# EAGLE board ESP-DMX (EAGLE 7.7.0)
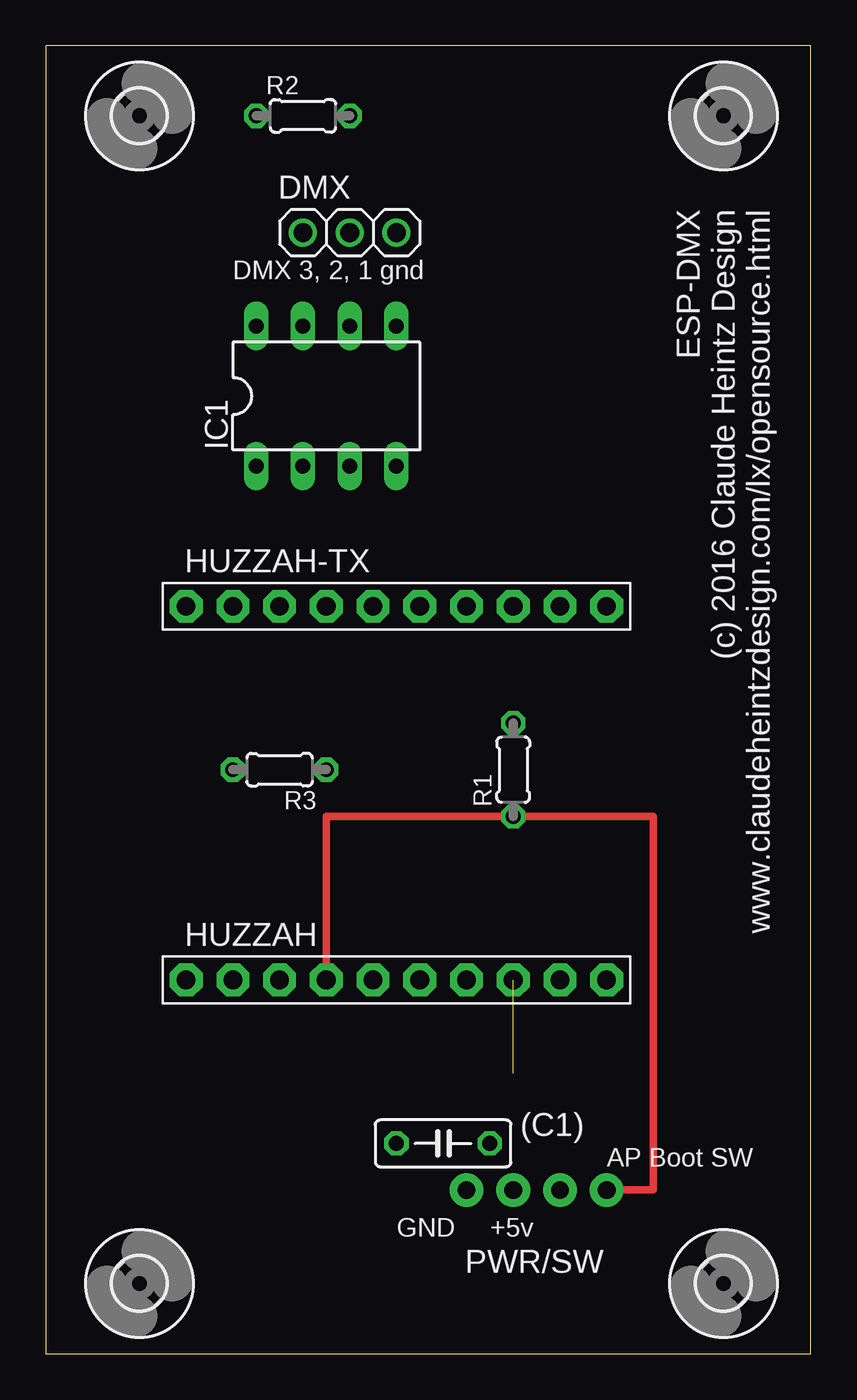
[diagram p0: board, top side]
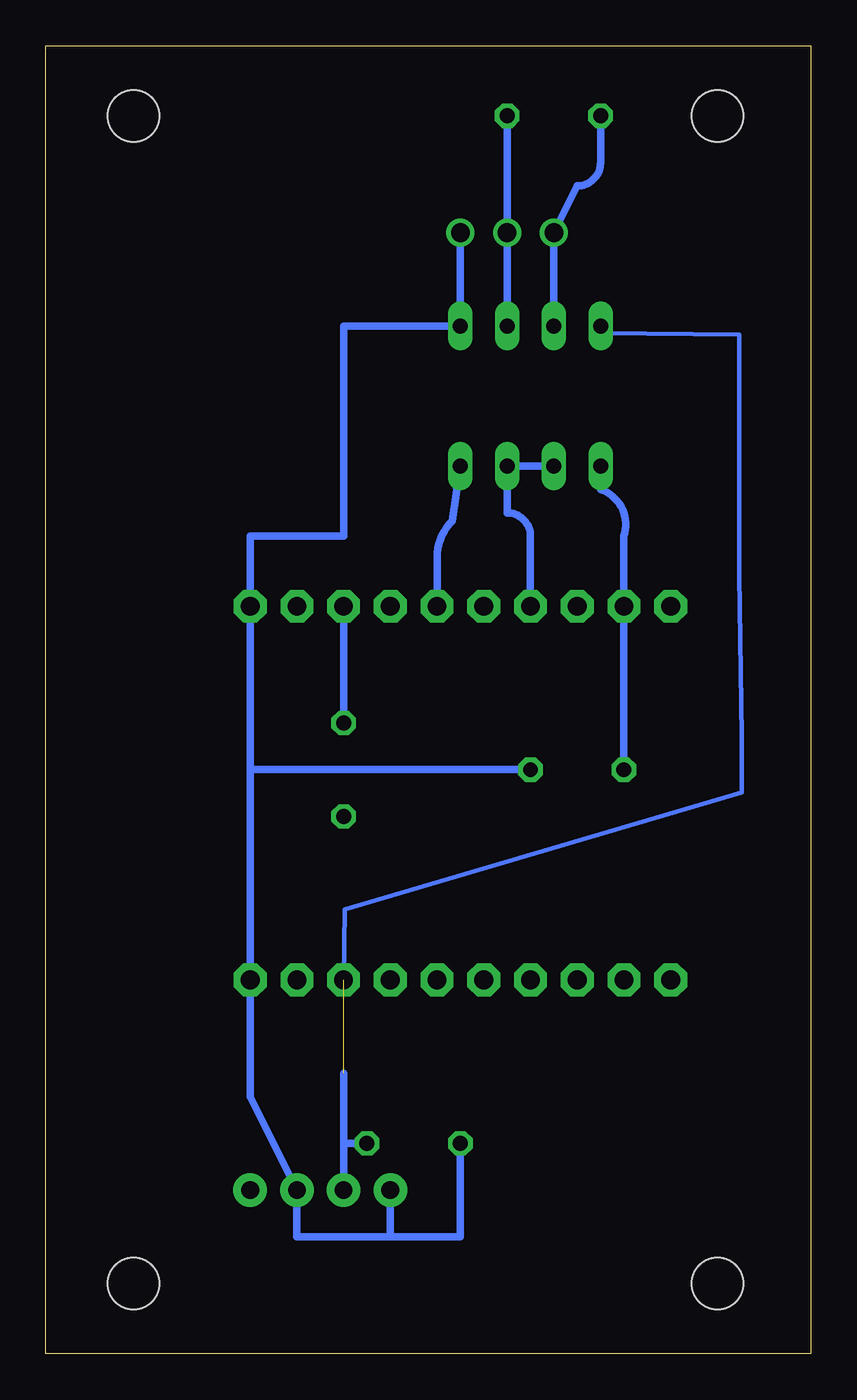
[diagram p1: board, bottom side, seen from below]

Size 41.58 x 71.11 mm. Coordinates in mm from the lower left corner, seen from the top.
Outline: 0,0 41.58,0 41.58,71.11 0,71.11 0,0
Copper layers (1*16): Top 0.035mm / dielectric 1.5mm / Bottom 0.035mm
Design rules "SeeedStudio_2layer_DRU_no_angle_20140221": minimum track width 6mil, minimum drill 12mil, track to track 6mil, track to pad 6mil, pad to pad 6mil, via to via 6mil, smd to smd 0mil, copper to edge 10mil, drill to drill 10mil, minimum pad ring 10mil, minimum via ring 6mil, stop-mask expansion 2mil, vias tented up to drill 100mil, thermal gap 10mil

## Footprints (pad centres in the part's own frame; a part is rotated, then mirrored left to right if it is on the bottom)
C050-025X075 = drill 0.813 octagon: 1 -2.54,0; 2 2.54,0
1X03 = drill 1.016: 1 -2.54,0; 2 0,0; 3 2.54,0
1X10-BIG = drill 1.016 pad 1.778 octagon: 1 -11.43,0; 2 -8.89,0; 3 -6.35,0; 4 -3.81,0; 5 -1.27,0; 6 1.27,0; 7 3.81,0; 8 6.35,0; 9 8.89,0; 10 11.43,0
DIL08 = drill 0.813 long: 1 -3.81,-3.81; 2 -1.27,-3.81; 3 1.27,-3.81; 4 3.81,-3.81; 5 3.81,3.81; 6 1.27,3.81; 7 -1.27,3.81; 8 -3.81,3.81
1X04_HEADER = drill 0.965 pad 1.829: 1 0,0; 2 2.54,0; 3 5.08,0; 4 7.62,0
RESISTOR = drill 0.813 octagon: 1 -2.54,0; 2 2.54,0
2,8 = hole 2.8: 0,0

## Placement (x,y rotation side)
(C1)  0.1uf  [C050-025X075]  21.59,11.43 0 top
DMX  [1X03]  16.51,60.96 0 top
HUZZAH  PINHD-1X10  [1X10-BIG]  19.05,20.32 0 top
HUZZAH-TX  PINHD-1X10  [1X10-BIG]  19.05,40.64 0 top
IC1  MAX481CPA  [DIL08]  15.24,52.07 0 top
PWR/SW  [1X04_HEADER]  22.86,8.89 0 top
R1  10k  [RESISTOR]  25.4,31.75 90 top
R2  120ohm  [RESISTOR]  13.97,67.31 0 top
R3  10Kohm  [RESISTOR]  12.7,31.75 180 top
U$3  [2,8]  5.08,67.31 0 top
U$4  [2,8]  36.83,67.31 0 top
U$5  [2,8]  5.08,3.81 0 top
U$6  [2,8]  36.83,3.81 0 top

## Library data of the parts
(C1) = resistor
DMX HUZZAH HUZZAH-TX = adafruit
IC1 = maxim; MPN: MAX481CPA+; OC_FARNELL: unknown; OC_NEWARK: 99K3445
PWR/SW R1-R3 = RBBB
U$3-U$6 = holes

## Nets
GND: (C1).1 DMX.3 HUZZAH-TX.10 HUZZAH.10 IC1.5 PWR/SW.1 PWR/SW.3 R3.1
N$1: DMX.1 IC1.7 R2.1
N$2: DMX.2 IC1.6 R2.2
N$3: HUZZAH-TX.6 IC1.4
N$4: HUZZAH-TX.4 IC1.2 IC1.3
N$5: HUZZAH-TX.2 IC1.1 R3.2
N$7: HUZZAH-TX.8 R1.2
N$8: HUZZAH.4 PWR/SW.4 R1.1
VCC: (C1).2 HUZZAH.8 IC1.8 PWR/SW.2

## Tracks (layer width: path | path; a pad name or v marks a point on that pad's centre or on a via)
GND
  Bottom 0.406: DMX.3 IC1.5 25.4,55.88 25.4,44.45 30.48,44.45 HUZZAH-TX.10 30.48,31.75 | 30.48,31.75 HUZZAH.10 30.48,13.97 PWR/SW.3 27.94,6.35 22.86,6.35 | 22.86,6.35 PWR/SW.1 | (C1).1 19.05,6.35 22.86,6.35 | R3.1 30.48,31.75
N$1
  Bottom 0.406: IC1.7 DMX.1 12.7,63.5 arc-90 11.43,64.77 R2.1
N$2
  Bottom 0.406: IC1.6 DMX.2 R2.2
N$3
  Bottom 0.406: IC1.4 19.49,45.28 arc-45 20.32,43.27 HUZZAH-TX.6
N$4
  Bottom 0.406: IC1.2 IC1.3 16.51,45.72 arc90 15.24,44.45 HUZZAH-TX.4
N$5
  Bottom 0.406: IC1.1 11.43,46.99 arc90 10.16,44.45 HUZZAH-TX.2 R3.2
N$7
  Bottom 0.406: HUZZAH-TX.8 R1.2
N$8
  Top 0.406: PWR/SW.4 33.02,8.89 33.02,29.21 R1.1 15.24,29.21 HUZZAH.4
VCC  (1 unrouted)
  Bottom 0.254: IC1.8 11.43,55.5 3.89,55.42 3.89,42.34 3.76,33.58 3.76,30.5 25.35,24.16 HUZZAH.8
  Bottom 0.406: 25.4,11.43 (C1).2 | PWR/SW.2 25.4,11.43 | 25.4,11.43 25.4,15.24

## Text on the board
tNames: ESP-DMX / (c) 2016 Claude Heintz Design / www.claudeheintzdesign.com/lx/opensource.html | DMX 3, 2, 1 gnd | AP Boot SW | GND | +5v